# EAGLE board EbookReader_Board (EAGLE 9.7.0)
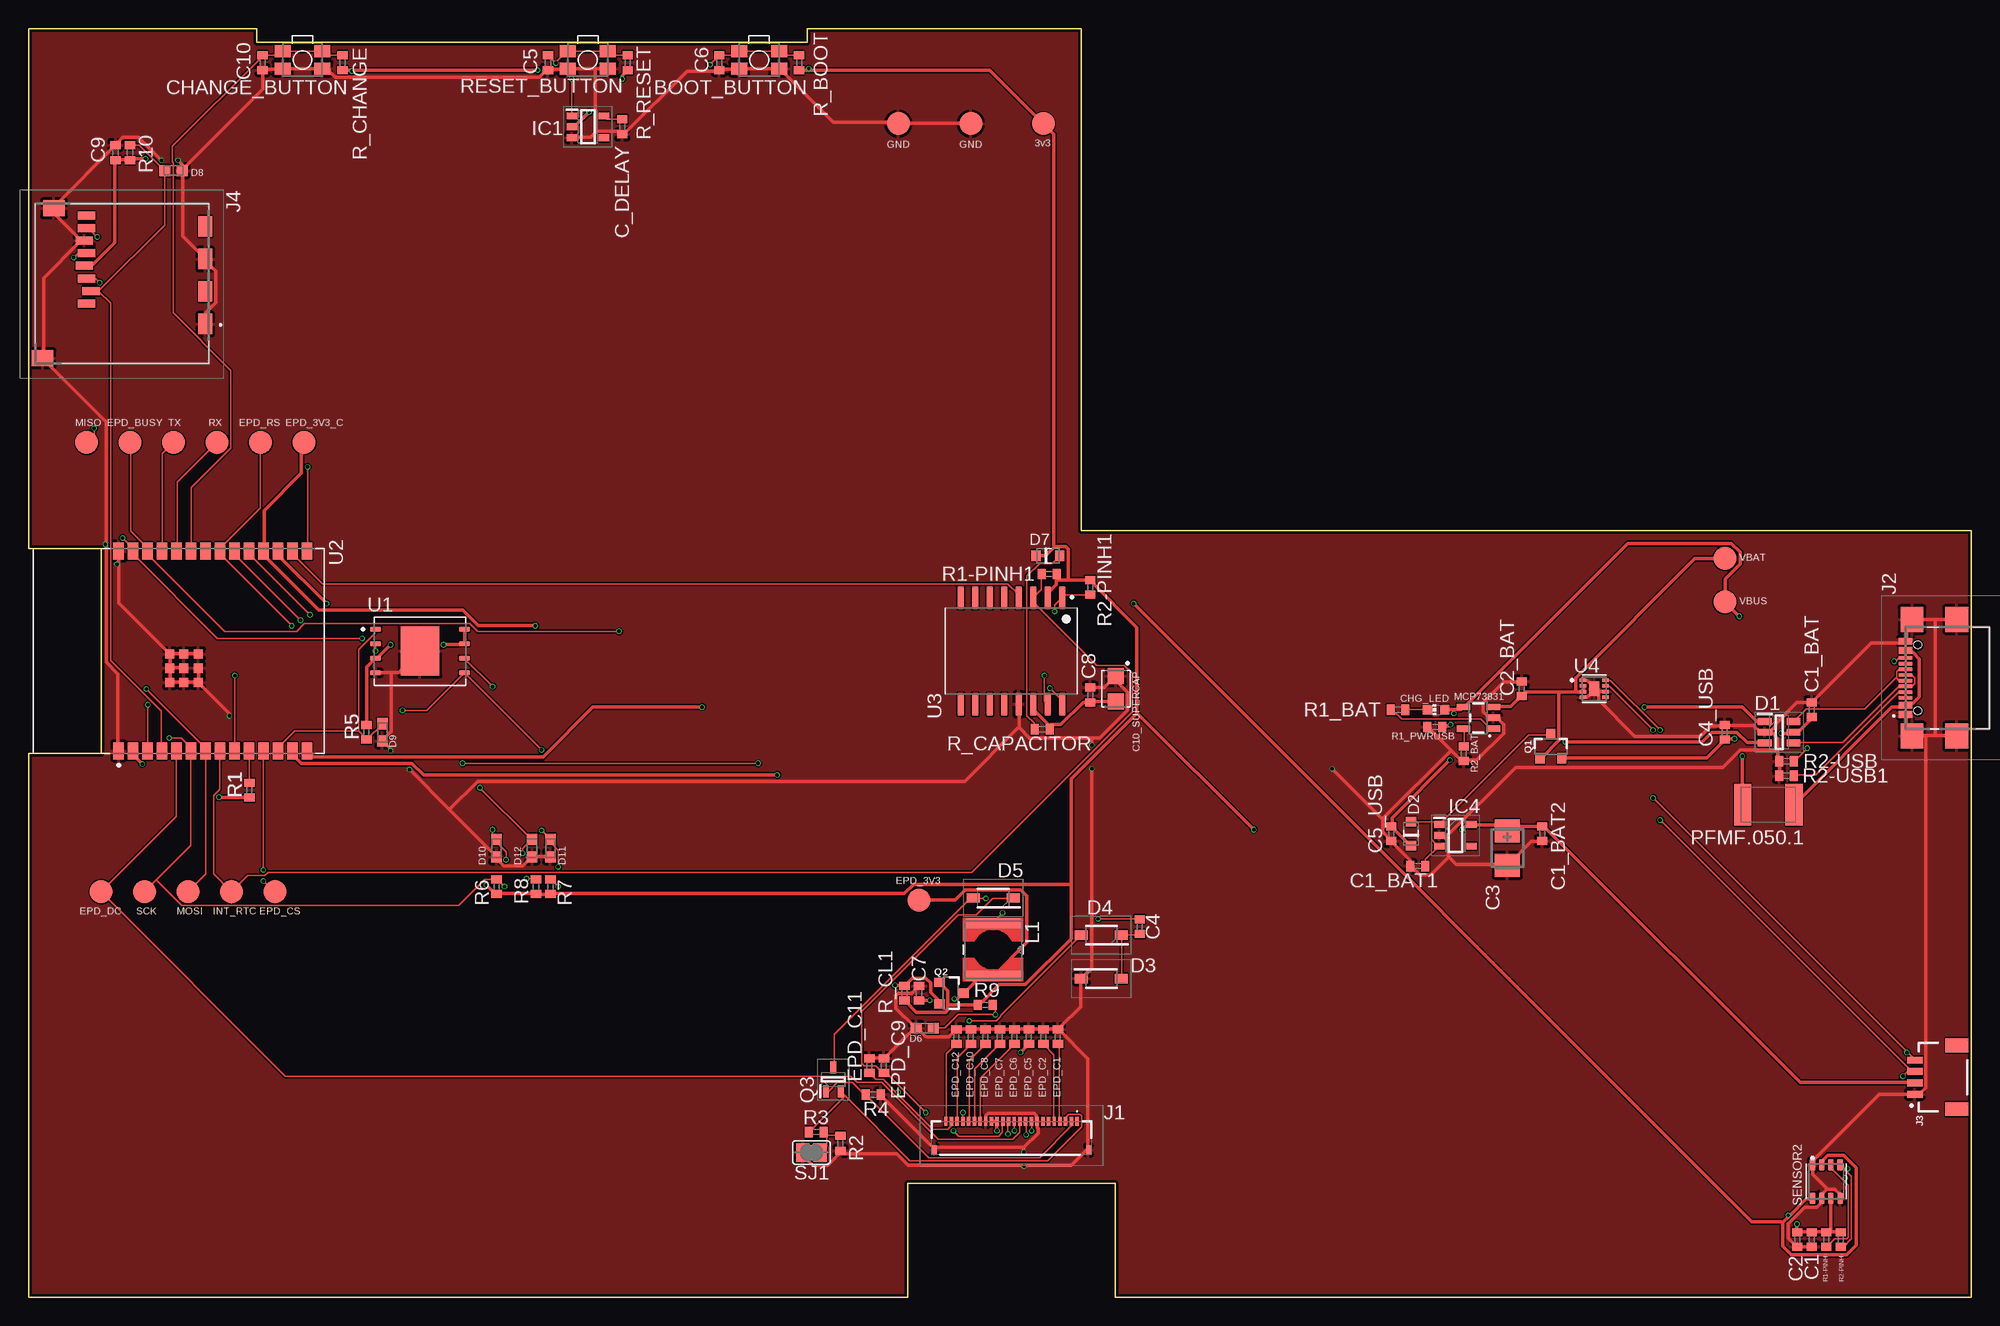
[diagram p0: board, top side]
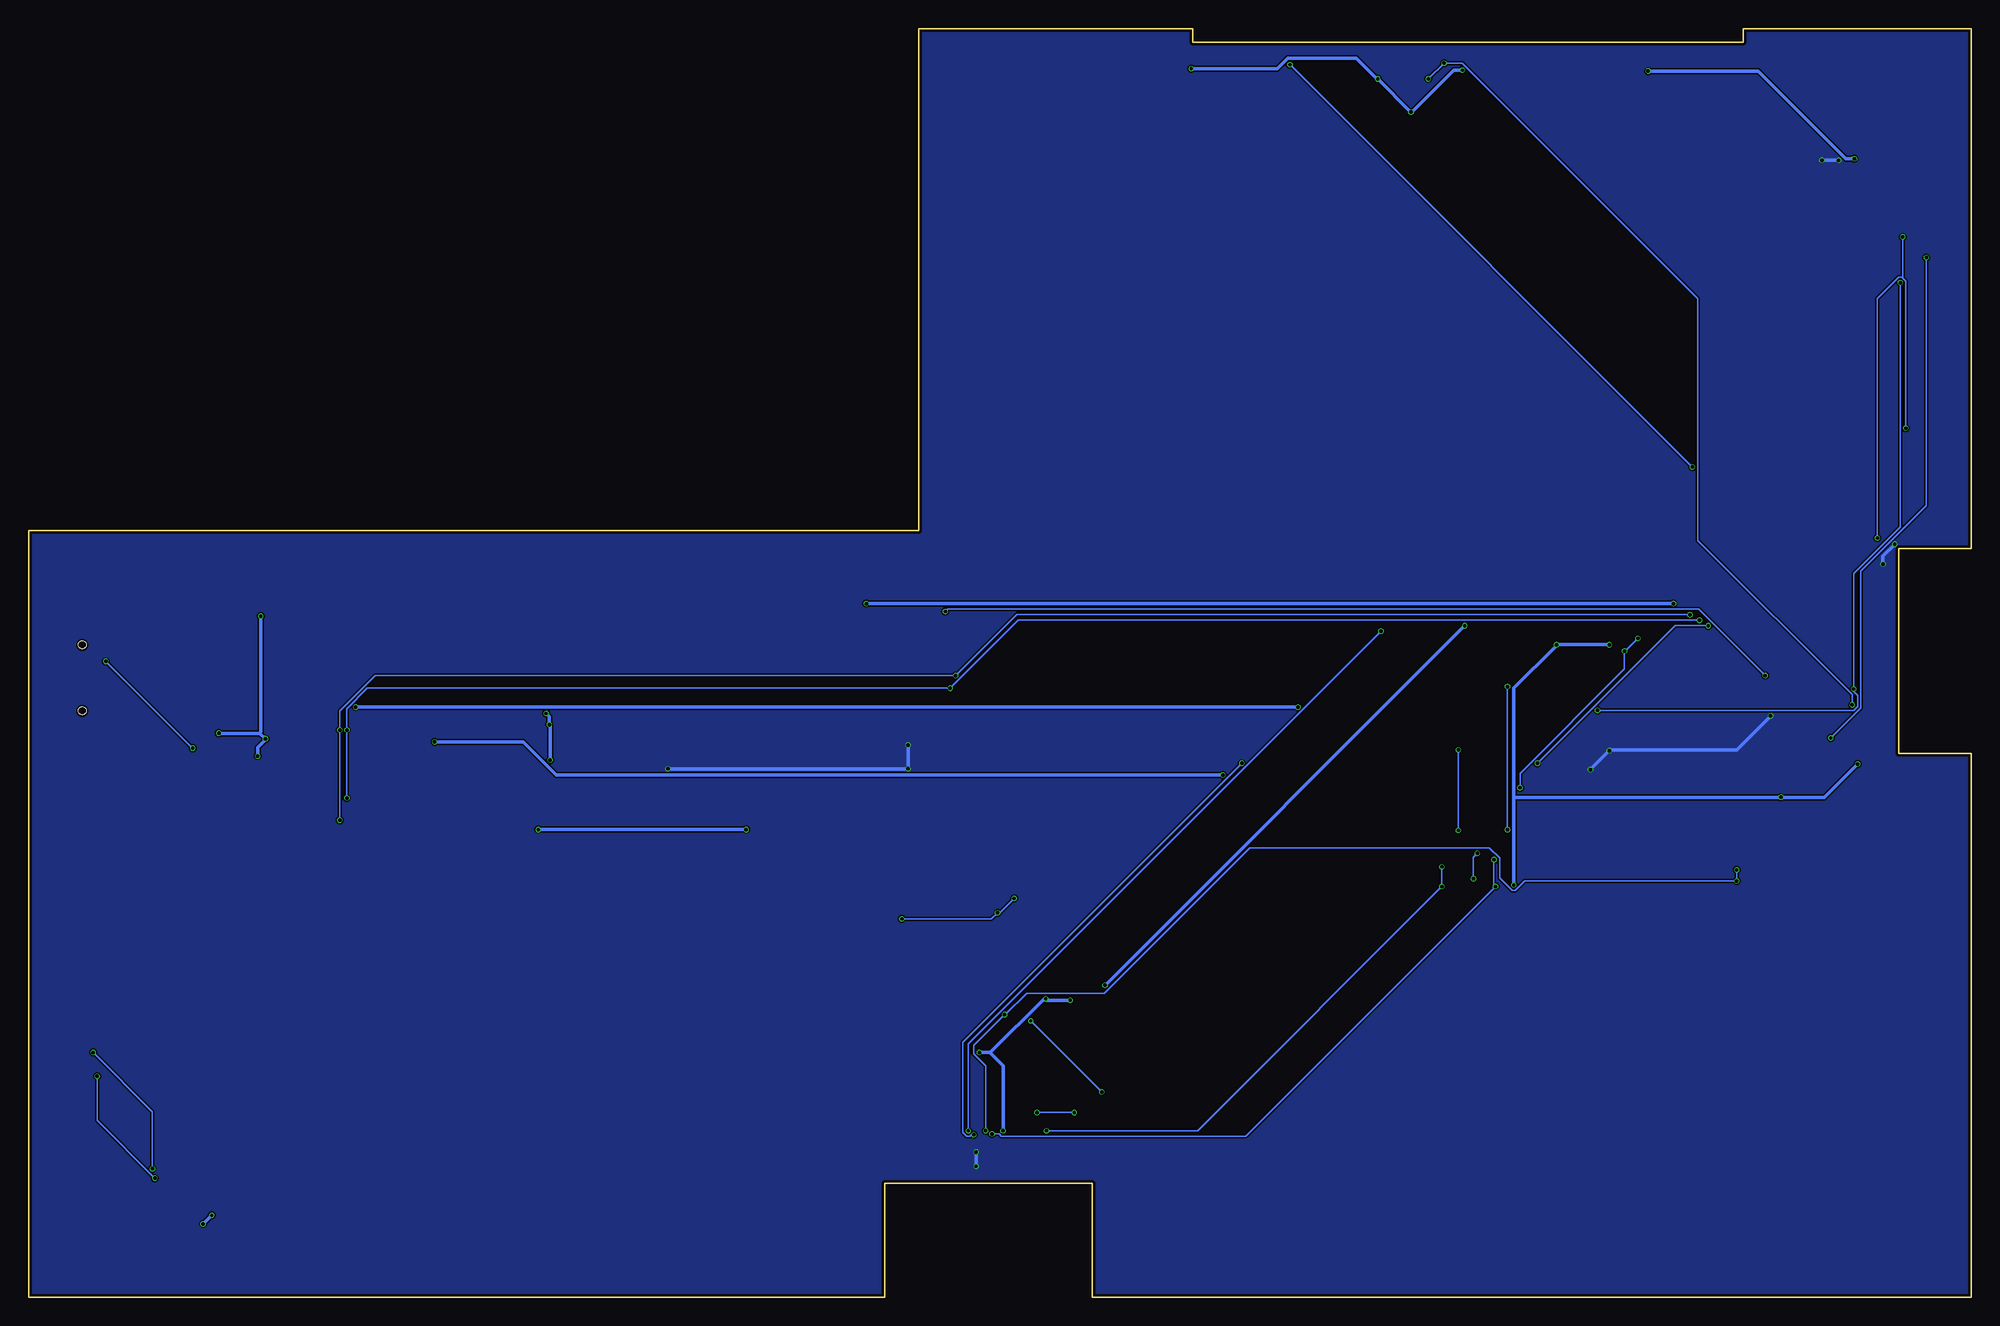
[diagram p1: board, bottom side, seen from below]

Size 170.2 x 111.2 mm. Coordinates in mm from the lower left corner, seen from the top.
Outline: 0,0 77,0 77,10 95.2,10 95.2,0 170.2,0 170.2,67.2 92.2,67.2 92.2,111.2 68.23,111.2 68.23,110 20,110 20,111.2 0,111.2 0,65.65 6.35,65.65 6.35,47.65 0,47.65 0,0
Copper layers (1*16): Top 0.035mm / dielectric 1.6mm / Bottom 0.035mm
Design rules "jlcpcb-2layers.dru": minimum track width 0.15mm, minimum drill 0.3mm, track to track 5mil, track to pad 5mil, pad to pad 5mil, via to via 5mil, smd to smd 5mil, copper to edge 0.2mm, drill to drill 6mil, minimum pad ring 10mil, minimum via ring 3mil, stop-mask expansion 4mil, vias tented up to drill 0mil, thermal gap 10mil
Net classes: 0 default: width 0.15 mm; 1 Power: width 0.3 mm

## Footprints (pad centres in the part's own frame; a part is rotated, then mirrored left to right if it is on the bottom)
MYBUTTON = smd 1.4 x 1.05: 1 1.75,0.75; 2 -1.75,0.75; 3 -1.75,-0.75; 4 1.75,-0.75
EAGLE-LTSPICE_C0402 = smd 0.7 x 0.9: 1 -0.65,0; 2 0.65,0
RCL_CT3528 = smd 2 x 2.2: + -1.5,0; - 1.5,0
CAPCP3225X100N = smd 1.4 x 1.4: 1 -1.1,0; 2 1.1,0
ADAFRUIT_CHIP-LED0603 = smd 0.8 x 0.8: A 0,-0.75; C 0,0.75
SOT95P280X145-6N = smd 1.2 x 0.6: 1 -1.25,0.95; 2 -1.25,0; 3 -1.25,-0.95; 4 1.25,-0.95; 5 1.25,0; 6 1.25,0.95
ESP32_WROVER_AVX---SD0805S020S1R0_AVX_SD0805S020S1R0_0 = smd 0.8 x 0.9: 1 -1.05,0; 2 1.05,0
SOD3716X135N = smd 1.15 x 0.8: 1 -1.75,0; 2 1.75,0
DIOC1608X36N = smd 0.97 x 0.94: 1 -0.75,0; 2 0.75,0
SOT95P280X125-5N = smd 0.9 x 0.6: 1 -1.4,0.95; 2 -1.4,0; 3 -1.4,-0.95; 4 1.4,-0.95; 5 1.4,0.95
SOT95P280X120-5N = smd 0.9 x 0.6: 1 -1.4,0.95; 2 -1.4,0; 3 -1.4,-0.95; 4 1.4,-0.95; 5 1.4,0.95
FH34SRJ24S05SH99 = smd 0.3 x 0.8: 1 5.75,1.45; 2 5.25,1.45; 3 4.75,1.45; 4 4.25,1.45; 5 3.75,1.45; 6 3.25,1.45; 7 2.75,1.45; 8 2.25,1.45; 9 1.75,1.45; 10 1.25,1.45; 11 0.75,1.45; 12 0.25,1.45; 13 -0.25,1.45; 14 -0.75,1.45; 15 -1.25,1.45; 16 -1.75,1.45; 17 -2.25,1.45; 18 -2.75,1.45; 19 -3.25,1.45; 20 -3.75,1.45; 21 -4.25,1.45; 22 -4.75,1.45; 23 -5.25,1.45; 24 -5.75,1.45 | smd 0.4 x 0.8: MP1 6.75,-1.05; MP2 -6.75,-1.05
SAMACSYS_PARTS_USB4110GFA = smd 0.3 x 1.15: A1 -3.35,3.678; A4 -2.55,3.678; A5 -1.25,3.678; A6 -0.25,3.678; A7 0.25,3.678; A8 1.25,3.678; A9 2.55,3.678; A12 3.35,3.678; B1 3.05,3.678; B4 2.25,3.678; B5 1.75,3.678; B6 0.75,3.678; B7 -0.75,3.678; B8 -1.75,3.678; B9 -2.25,3.678; B12 -3.05,3.678 | smd 2.18 x 2: MP1 -5.11,-0.827; MP2 5.11,-0.827; MP3 -5.11,3.103; MP4 5.11,3.103 | hole 0.65: -2.89,2.603; 2.89,2.603
JST04_1MM_RA = smd 0.6 x 1.35: 1 -1.5,0; 2 -0.5,0; 3 0.5,0; 4 1.5,0 | smd 1.2 x 2: NC1 2.8,-3.675; NC2 -2.8,-3.675
112ATAARR03ATTEND = smd 1.8 x 1.2: G1 10.6,10.4; G2 4.9,10.4; S1 7.75,10.4; S2 2.05,10.4 | smd 1.4 x 1.9: G3 13.6,-3.85; G4 0.45,-2.85 | smd 0.7 x 1.5: P1 8.8,0; P2 7.7,0.4; P3 6.6,0; P4 5.5,-0.2; P5 4.4,0; P6 3.3,-0.2; P7 2.2,0; P8 1.1,0
IND_4828-WE-TPC_WRE = smd 0.889 x 4.826: 1 -2.286,0; 2 2.286,0
ESP32_WROVER_SPARKFUN-IC-POWER_SOT23-5 = smd 0.55 x 1.2: 1 -0.95,-1.3; 2 0,-1.3; 3 0.95,-1.3; 4 0.95,1.3; 5 -0.95,1.3
ESP32C6_VARISTOR_CT/CN1812 = smd 1.5 x 3.6: 1 -2.25,0; 2 2.25,0
ESP32_WROVER_SPARKFUN-DISCRETESEMI_SOT23-3 = smd 0.8 x 0.9: 1 -0.95,-1; 2 0.95,-1; 3 0,1.1
SOT65P210X110-3N = smd 1.05 x 0.5: 1 -1.05,0.65; 2 -1.05,-0.65; 3 1.05,0
ESP32_WROVER_EAGLE-LTSPICE_R0402 = smd 0.7 x 0.9: 1 -0.65,0; 2 0.65,0
ESP32_WROVER_BME680_PSON80P300X300X100-8N = smd 1.016 x 0.5: 1 1.458,1.2; 2 1.458,0.4; 3 1.458,-0.4; 4 1.458,-1.2; 5 -1.458,-1.22; 6 -1.458,-0.4; 7 -1.458,0.4; 8 -1.458,1.2
SJ = smd 1.168 x 1.6: 1 -0.762,0; 2 0.762,0
TP20R = smd 2 x 2: TP 0,0
SON127P600X800X80-9N = smd 0.94 x 0.44: 1 -3.895,1.905; 2 -3.895,0.635; 3 -3.895,-0.635; 4 -3.895,-1.905; 5 3.895,-1.905; 6 3.895,-0.635; 7 3.895,0.635; 8 3.895,1.905 | smd 3.4 x 4.3: 9 0,0
XCVR_ESP32-C6-WROOM-1-N8 = smd 1.5 x 0.9: 1 -8.75,5.26; 2 -8.75,3.99; 3 -8.75,2.72; 4 -8.75,1.45; 5 -8.75,0.18; 6 -8.75,-1.09; 7 -8.75,-2.36; 8 -8.75,-3.63; 9 -8.75,-4.9; 10 -8.75,-6.17; 11 -8.75,-7.44; 12 -8.75,-8.71; 13 -8.75,-9.98; 14 -8.75,-11.25; 15 8.75,-11.25; 16 8.75,-9.98; 17 8.75,-8.71; 18 8.75,-7.44; 19 8.75,-6.17; 20 8.75,-4.9; 21 8.75,-3.63; 22 8.75,-2.36; 23 8.75,-1.09; 24 8.75,0.18; 25 8.75,1.45; 26 8.75,2.72; 27 8.75,3.99; 28 8.75,5.26 | smd 0.8 x 0.8: 29_1 -2.755,0.79; 29_2 -1.505,0.79; 29_3 -0.255,0.79; 29_4 -2.755,-0.46; 29_5 -1.505,-0.46; 29_6 -0.255,-0.46; 29_7 -2.755,-1.71; 29_8 -1.505,-1.71; 29_9 -0.255,-1.71
SOIC127P1032X265-16N = smd 2.05 x 0.59: 1 -4.655,4.445; 2 -4.655,3.175; 3 -4.655,1.905; 4 -4.655,0.635; 5 -4.655,-0.635; 6 -4.655,-1.905; 7 -4.655,-3.175; 8 -4.655,-4.445; 9 4.655,-4.445; 10 4.655,-3.175; 11 4.655,-1.905; 12 4.655,-0.635; 13 4.655,0.635; 14 4.655,1.905; 15 4.655,3.175; 16 4.655,4.445
SON50P200X200X80-9N = smd 0.635 x 0.305: 1 -0.985,0.75; 2 -0.985,0.25; 3 -0.985,-0.25; 4 -0.985,-0.75; 5 0.985,-0.75; 6 0.985,-0.25; 7 0.985,0.25; 8 0.985,0.75 | smd 0.9 x 1.3: 9 0,0

## Placement (x,y rotation side)
BOOT_BUTTON  BUTTON_CUSYOMV1FINAL_BUTT  [MYBUTTON]  64,108.45 180 top
C1  100nF  [EAGLE-LTSPICE_C0402]  156.21,5.08 270 top
C1_BAT  4.7uF  [EAGLE-LTSPICE_C0402]  156.21,51.5 90 top
C1_BAT1  4.7uF  [EAGLE-LTSPICE_C0402]  121.7,37.8 180 top
C1_BAT2  4.7uF  [EAGLE-LTSPICE_C0402]  132.6,40.64 270 top
C2  100nF  [EAGLE-LTSPICE_C0402]  154.94,5.08 270 top
C2_BAT  4.7uF  [EAGLE-LTSPICE_C0402]  130.81,53.34 90 top
C3  100uF TANT  [RCL_CT3528]  129.54,39.37 270 top
C4  4.7uF/25V  [EAGLE-LTSPICE_C0402]  97.35,32.5 90 top
C4_USB  100nF  [EAGLE-LTSPICE_C0402]  148.59,49.53 90 top
C5  1uF  [EAGLE-LTSPICE_C0402]  45.5,108.2 270 top
C5_USB  4.7uF  [EAGLE-LTSPICE_C0402]  119.38,40.64 270 top
C6  100nF  [EAGLE-LTSPICE_C0402]  60.5,108.2 270 top
C7  10uF  [EAGLE-LTSPICE_C0402]  78,26.67 90 top
C8  100nF  [EAGLE-LTSPICE_C0402]  93,52.8 90 top
C9  100nF  [EAGLE-LTSPICE_C0402]  7.62,100.33 90 top
C10  100nF  [EAGLE-LTSPICE_C0402]  20.5,108.2 270 top
C10_SUPERCAP  CPH3225A  [CAPCP3225X100N]  95.25,53.34 270 top
C_DELAY  100nF  [EAGLE-LTSPICE_C0402]  52,102.58 270 top
CHANGE_BUTTON  BUTTON_CUSYOMV1FINAL_BUTT  [MYBUTTON]  24,108.45 180 top
CHG_LED  [ADAFRUIT_CHIP-LED0603]  123.3,51.5 90 top
D1  USBLC6-2SC6Y  [SOT95P280X145-6N]  153.35,49.53 0 top
D2  ESP32_WROVER_AVX---SD0805S020S1R0_AVX_SD0805S020S1R0_0_0  [ESP32_WROVER_AVX---SD0805S020S1R0_AVX_SD0805S020S1R0_0]  121.1,40.64 90 top
D3  MBR0530MYSOD  [SOD3716X135N]  93.98,27.94 0 top
D4  MBR0530MYSOD  [SOD3716X135N]  93.98,31.75 180 top
D5  MBR0530MYSOD  [SOD3716X135N]  84.5,35 180 top
D6  PGB1010603MRMYDIOC  [DIOC1608X36N]  78.5,23.6 0 top
D7  ESP32_WROVER_AVX---SD0805S020S1R0_AVX_SD0805S020S1R0_0_0  [ESP32_WROVER_AVX---SD0805S020S1R0_AVX_SD0805S020S1R0_0]  89.3,65 0 top
D8  PGB1010603MRMYDIOC  [DIOC1608X36N]  12.7,98.75 180 top
D9  PGB1010603MRMYDIOC  [DIOC1608X36N]  31,49.53 90 top
D10  PGB1010603MRMYDIOC  [DIOC1608X36N]  41,39.37 90 top
D11  PGB1010603MRMYDIOC  [DIOC1608X36N]  45.72,39.37 90 top
D12  PGB1010603MRMYDIOC  [DIOC1608X36N]  44.11,39.37 90 top
EPD_C1  1uF/50V  [EAGLE-LTSPICE_C0402]  90.17,22.86 90 top
EPD_C2  1uF/50V  [EAGLE-LTSPICE_C0402]  88.9,22.86 90 top
EPD_C5  0.1uF/50V  [EAGLE-LTSPICE_C0402]  87.63,22.86 90 top
EPD_C6  1uF/50V  [EAGLE-LTSPICE_C0402]  86.36,22.86 90 top
EPD_C7  1uF/50V  [EAGLE-LTSPICE_C0402]  85.09,22.86 90 top
EPD_C8  1uF/50V  [EAGLE-LTSPICE_C0402]  83.82,22.86 90 top
EPD_C9  1uF/50V  [EAGLE-LTSPICE_C0402]  74.93,20.32 90 top
EPD_C10  1uF/50V  [EAGLE-LTSPICE_C0402]  82.55,22.86 90 top
EPD_C11  1uF/50V  [EAGLE-LTSPICE_C0402]  73.66,20.32 90 top
EPD_C12  1uF/50V  [EAGLE-LTSPICE_C0402]  81.28,22.86 90 top
IC1  BD5229G-TR  [SOT95P280X125-5N]  49,102.58 0 top
IC4  XC6220A331MR-G  [SOT95P280X120-5N]  125,40.5 0 top
J1  FH34SRJ-24S-0.5SH_99_  [FH34SRJ24S05SH99]  86.1,13.97 0 top
J2  SAMACSYS_PARTS_USB4110-GF-A  [SAMACSYS_PARTS_USB4110GFA]  168.1,54.3 90 top
J3  QWIIC_RIGHT_ANGLE  [JST04_1MM_RA]  165.24,19.3 90 top
J4  112A-TAAR-R03_ATTEND  [112ATAARR03ATTEND]  5.08,95.9 270 top
L1  744043680IND_4828-WE-TPC_WRE  [IND_4828-WE-TPC_WRE]  84.5,30.48 270 top
MCP73831  ESP32_WROVER_SPARKFUN-IC-POWER_MCP73831  [ESP32_WROVER_SPARKFUN-IC-POWER_SOT23-5]  127,50.8 90 top
PFMF.050.1  ESP32C6_VARISTORCN1812  [ESP32C6_VARISTOR_CT/CN1812]  152.4,43.18 180 top
Q1  20V/4.2A/52mΩ/1.4W  [ESP32_WROVER_SPARKFUN-DISCRETESEMI_SOT23-3]  133.35,48.26 0 top
Q2  20V/4.2A/52mΩ/1.4W  [ESP32_WROVER_SPARKFUN-DISCRETESEMI_SOT23-3]  80.8,26.67 270 top
Q3  SI1308EDL-T1-GE3  [SOT65P210X110-3N]  70.5,19.1 90 top
R1  10K  [ESP32_WROVER_EAGLE-LTSPICE_R0402]  19.35,44.45 90 top
R1-PINH  10k  [ESP32_WROVER_EAGLE-LTSPICE_R0402]  157.48,5.08 90 top
R1-PINH1  10k  [ESP32_WROVER_EAGLE-LTSPICE_R0402]  89.4,63.4 0 top
R1_BAT  200  [ESP32_WROVER_EAGLE-LTSPICE_R0402]  119.96,51.5 0 top
R1_PWRUSB  100K  [ESP32_WROVER_EAGLE-LTSPICE_R0402]  123.19,50 0 top
R2  2.2  [ESP32_WROVER_EAGLE-LTSPICE_R0402]  71.12,13.5 90 top
R2-PINH  10k  [ESP32_WROVER_EAGLE-LTSPICE_R0402]  158.75,5.08 90 top
R2-PINH1  10k  [ESP32_WROVER_EAGLE-LTSPICE_R0402]  93,62.23 90 top
R2-USB  5k1  [ESP32_WROVER_EAGLE-LTSPICE_R0402]  154,46.99 180 top
R2-USB1  5k1  [ESP32_WROVER_EAGLE-LTSPICE_R0402]  154,45.72 0 top
R2_BAT  2K  [ESP32_WROVER_EAGLE-LTSPICE_R0402]  125.73,47.65 90 top
R3  0.47  [ESP32_WROVER_EAGLE-LTSPICE_R0402]  69,14.5 0 top
R4  10K  [ESP32_WROVER_EAGLE-LTSPICE_R0402]  74,17.78 0 top
R5  10k  [ESP32_WROVER_EAGLE-LTSPICE_R0402]  29.6,49.53 90 top
R6  10k  [ESP32_WROVER_EAGLE-LTSPICE_R0402]  41,36 270 top
R7  10k  [ESP32_WROVER_EAGLE-LTSPICE_R0402]  45.72,36 270 top
R8  10k  [ESP32_WROVER_EAGLE-LTSPICE_R0402]  44.45,36 270 top
R9  10k  [ESP32_WROVER_EAGLE-LTSPICE_R0402]  83.82,25.65 180 top
R10  10k  [ESP32_WROVER_EAGLE-LTSPICE_R0402]  8.89,100.33 270 top
R_BOOT  10k  [ESP32_WROVER_EAGLE-LTSPICE_R0402]  67.5,108.2 90 top
R_CAPACITOR  15  [ESP32_WROVER_EAGLE-LTSPICE_R0402]  88.8,49.8 180 top
R_CHANGE  10k  [ESP32_WROVER_EAGLE-LTSPICE_R0402]  27.5,108.2 90 top
R_CL1  10k  [ESP32_WROVER_EAGLE-LTSPICE_R0402]  76.73,26.67 90 top
R_RESET  10k  [ESP32_WROVER_EAGLE-LTSPICE_R0402]  52.5,108.2 90 top
RESET_BUTTON  BUTTON_CUSYOMV1FINAL_BUTT  [MYBUTTON]  49,108.45 180 top
SENSOR2  ESP32_WROVER_BME680_BME680  [ESP32_WROVER_BME680_PSON80P300X300X100-8N]  157.48,10.16 90 top
SJ1  [SJ]  68.58,12.7 0 top
TP1  TP  [TP20R]  12.7,74.93 0 top
TP2  TP  [TP20R]  16.51,74.93 0 top
TP3  TP  [TP20R]  148.59,64.77 0 top
TP4  TP  [TP20R]  82.55,102.87 0 top
TP5  TP  [TP20R]  76.2,102.87 0 top
TP6  TP  [TP20R]  5.08,74.93 0 top
TP7  TP  [TP20R]  13.97,35.56 0 top
TP8  TP  [TP20R]  10.16,35.56 0 top
TP9  TP  [TP20R]  8.89,74.93 0 top
TP10  TP  [TP20R]  21.59,35.56 0 top
TP11  TP  [TP20R]  6.35,35.56 0 top
TP12  TP  [TP20R]  20.32,74.93 0 top
TP13  TP  [TP20R]  24.13,74.93 0 top
TP14  TP  [TP20R]  148.59,60.96 0 top
TP15  TP  [TP20R]  17.78,35.56 0 top
TP16  TP  [TP20R]  88.9,102.87 0 top
TP17  TP  [TP20R]  78,34.8 0 top
U1  W25Q512JVEIQ  [SON127P600X800X80-9N]  34.29,56.65 0 top
U2  ESP32-C6-WROOM-1-N8  [XCVR_ESP32-C6-WROOM-1-N8]  13.15,56.65 90 top
U3  DS3231SN#  [SOIC127P1032X265-16N]  86.1,56.65 270 top
U4  MAX17048G+T10  [SON50P200X200X80-9N]  137.16,53.34 0 top

## Library data of the parts
BOOT_BUTTON CHANGE_BUTTON RESET_BUTTON = DeskCopy
C1 C1_BAT C1_BAT1 C1_BAT2 C2 C2_BAT C4 C4_USB C5 C5_USB C6-C10 C_DELAY CHG_LED D3-D6 D8-D12 EPD_C1 EPD_C2 EPD_C5-EPD_C12 PFMF.050.1 R1 R1-PINH R1-PINH1 R1_BAT R1_PWRUSB R2 R2-PINH R2-PINH1 R2-USB R2-USB1 R2_BAT R3-R10 R_BOOT R_CAPACITOR R_CHANGE R_CL1 R_RESET SJ1 TP1-TP17 = DeskAssistant v19 v1
C3 = DeskAssistant v19 v1; SPICEPREFIX: C
C10_SUPERCAP = DeskAssistant v19 v1; AVAILABILITY: Not in stock; CHECK_PRICES: https://www.snapeda.com/parts/CPH3225A/Seiko+Instruments/view-part/?ref=eda; DESCRIPTION: 11 mF (EDLC) Supercapacitor 3.3 V 1210 (3225 Metric) - -; MF: Seiko Instruments; MP: CPH3225A; PACKAGE: 1210 Seiko; PRICE: None; PURCHASE-URL: https://www.snapeda.com/api/url_track_click_mouser/?unipart_id=562593&manufacturer=Seiko Instruments&part_name=CPH3225A&search_term=None; SNAPEDA_LINK: https://www.snapeda.com/parts/CPH3225A/Seiko+Instruments/view-part/?ref=snap
D1 = DeskAssistant v19 v1; AVAILABILITY: In Stock; CHECK_PRICES: https://www.snapeda.com/parts/USBLC6-2SC6Y/STMicroelectronics/view-part/?ref=eda; DESCRIPTION: 17V Clamp 5A (8/20µs) Ipp Tvs Diode Surface Mount SOT-23-6; MF: STMicroelectronics; MP: USBLC6-2SC6Y; PACKAGE: SOT-23-6 STMicroelectronics; PRICE: None; SNAPEDA_LINK: https://www.snapeda.com/parts/USBLC6-2SC6Y/STMicroelectronics/view-part/?ref=snap
D2 D7 = DeskAssistant v19 v1; FOOPRINT: SD0805S020S1R0
IC1 = DeskAssistant v19 v1; DESCRIPTION: Voltage Detector with Adjustable Delay Time: CMOS processes are utilized to develop high precision, low current consumption CMOS reset ICs that allow arbitrary setting of the delay time. The extensive lineup includes both Nch Open Drain and CMOS output types in a wide range of detection voltages (from 2.3V to 6.0V, in 0.1V steps), enabling selection of the ideal solution based on customer requirements. In addition, the entire series is of course both lead-free and RoHS-compliant.; HEIGHT: 1.25mm; MANUFACTURER_NAME: ROHM Semiconductor; MANUFACTURER_PART_NUMBER: BD5229G-TR; MOUSER_PART_NUMBER: 755-BD5229G-TR; MOUSER_PRICE-STOCK: https://www.mouser.co.uk/ProductDetail/ROHM-Semiconductor/BD5229G-TR?qs=4kLU8WoGk0vvnhrrYwdszw%3D%3D
IC4 = DeskAssistant v19 v1; DESCRIPTION: LDO Voltage Regulators; HEIGHT: 1.2mm; MANUFACTURER_NAME: Torex; MANUFACTURER_PART_NUMBER: XC6220A331MR-G; MOUSER_PART_NUMBER: 865-XC6220A331MR-G; MOUSER_PRICE-STOCK: https://www.mouser.co.uk/ProductDetail/Torex-Semiconductor/XC6220A331MR-G?qs=AsjdqWjXhJ8ZSWznL1J0gg%3D%3D
J1 = DeskAssistant v19 v1; DESCRIPTION: 24 Position FFC, FPC Connector Contacts, Top and Bottom 0.020" (0.50mm) Surface Mount, Right Angle; HEIGHT: 1.1mm; MANUFACTURER_NAME: Hirose; MANUFACTURER_PART_NUMBER: FH34SRJ-24S-0.5SH(99); MOUSER_PART_NUMBER: 798-FH34SRJ24S05SH99; MOUSER_PRICE-STOCK: https://www.mouser.co.uk/ProductDetail/Hirose-Connector/FH34SRJ-24S-0.5SH99?qs=vcbW%252B4%252BSTIpKBl5ap9J8Fw%3D%3D
J2 = DeskCopy; DESCRIPTION: CONN USB 2.0 TYPE-C R/A SMT; HEIGHT: 3.26mm; MANUFACTURER_NAME: GCT (GLOBAL CONNECTOR TECHNOLOGY); MANUFACTURER_PART_NUMBER: USB4110-GF-A; MOUSER_PART_NUMBER: 640-USB4110-GF-A; MOUSER_PRICE-STOCK: https://www.mouser.co.uk/ProductDetail/GCT/USB4110-GF-A?qs=KUoIvG%2F9IlYiZvIXQjyJeA%3D%3D
J3 = DeskAssistant v19 v1; PROD_ID: CONN-13694
J4 = DeskAssistant v19 v1; DESCRIPTION: Micro SD Card Socket, Push-Push Type, Top Mount, SMT, H=1.83mm, 10u; HEIGHT: 1.9mm; MANUFACTURER_NAME: ATTEND; MANUFACTURER_PART_NUMBER: 112A-TAAR-R03 ATTEND
L1 = DeskAssistant v19 v1; COPYRIGHT: Copyright (C) 2024 Ultra Librarian. All rights reserved.; MANUFACTURER_PART_NUMBER: 744043680; MFR_NAME: Wurth Electronics; VAL: 68uH
MCP73831 = DeskAssistant v19 v1; PROD_ID: IC-09995
Q1 Q2 = DeskAssistant v19 v1; FOOTPRINT: DMG2305UX-7
Q3 = DeskAssistant v19 v1; AVAILABILITY: In Stock; CHECK_PRICES: https://www.snapeda.com/parts/SI1308EDL-T1-GE3/Vishay+Siliconix/view-part/?ref=eda; DESCRIPTION: Si1308EDL-T1-GE3 N-channel MOSFET Transistor, 1.5 A, 30 V, 3-Pin SC-70 | Siliconix / Vishay SI1308EDL-T1-GE3; MF: Vishay Siliconix; MP: SI1308EDL-T1-GE3; PACKAGE: SOT-323 Vishay Semiconductor; PRICE: None; PURCHASE-URL: https://www.snapeda.com/api/url_track_click_mouser/?unipart_id=274603&manufacturer=Vishay Siliconix&part_name=SI1308EDL-T1-GE3&search_term=None; SNAPEDA_LINK: https://www.snapeda.com/parts/SI1308EDL-T1-GE3/Vishay+Siliconix/view-part/?ref=snap
SENSOR2 = DeskAssistant v19 v1; AVAILABILITY: Unavailable; DESCRIPTION: Integrated Environmental Unit; FOOTPRINT: BME688; MF: Bosch Sensortec; MP: BME680; PACKAGE: LGA-8 Bosch Tools; PRICE: None
U1 = DeskAssistant v19 v1; AVAILABILITY: In Stock; CHECK_PRICES: https://www.snapeda.com/parts/W25Q512JVEIQ/Winbond+Electronics/view-part/?ref=eda; DESCRIPTION: FLASH - NOR Memory IC 512Mb (64M x 8) SPI - Quad I/O 133 MHz 8-WSON (8x6); MF: Winbond Electronics; MP: W25Q512JVEIQ; PACKAGE: Package; PRICE: None; SNAPEDA_LINK: https://www.snapeda.com/parts/W25Q512JVEIQ/Winbond+Electronics/view-part/?ref=snap
U2 = DeskAssistant v19 v1; AVAILABILITY: In Stock; CHECK_PRICES: https://www.snapeda.com/parts/ESP32-C6-WROOM-1-N8/Espressif+Systems/view-part/?ref=eda; DESCRIPTION: Multiprotocol Modules ESP32-C6 module, Wi-Fi 6 in 2.4 GHz band, Bluetooth 5, Zigbee 3.0 and Thread. ESP34-WROOM Compatible - ENGINEERING SAMPLE; MF: Espressif Systems; MP: ESP32-C6-WROOM-1-N8; PACKAGE: None; PRICE: None; SNAPEDA_LINK: https://www.snapeda.com/parts/ESP32-C6-WROOM-1-N8/Espressif+Systems/view-part/?ref=snap
U3 = DeskAssistant v19 v1; AVAILABILITY: In Stock; CHECK_PRICES: https://www.snapeda.com/parts/DS3231SN%23/Analog+Devices/view-part/?ref=eda; DESCRIPTION: Extremely Accurate I²C-Integrated RTC/TCXO/Crystal; MF: Analog Devices; MP: DS3231SN#; PACKAGE: SOIC-16 Maxim; PRICE: None; PURCHASE-URL: https://www.snapeda.com/api/url_track_click_mouser/?unipart_id=99048&manufacturer=Analog Devices&part_name=DS3231SN#&search_term=None; SNAPEDA_LINK: https://www.snapeda.com/parts/DS3231SN%23/Analog+Devices/view-part/?ref=snap
U4 = DeskAssistant v19 v1; AVAILABILITY: In Stock; CHECK_PRICES: https://www.snapeda.com/parts/MAX17048G+T10/Analog+Devices/view-part/?ref=eda; DESCRIPTION: 3µA 1-Cell/2-Cell Fuel Gauge with ModelGauge; MF: Analog Devices; MP: MAX17048G+T10; PACKAGE: TDFN-8 Maxim; PRICE: None; PURCHASE-URL: https://www.snapeda.com/api/url_track_click_mouser/?unipart_id=329239&manufacturer=Analog Devices&part_name=MAX17048G+T10&search_term=None; SNAPEDA_LINK: https://www.snapeda.com/parts/MAX17048G+T10/Analog+Devices/view-part/?ref=snap; SPICEPREFIX: X

## Nets
3V3 [Power]: C1_BAT2.1 C3.+ C9.1 D7.1 IC1.2 IC4.5 J3.2 J4.P4 Q2.1 R1-PINH1.2 R1.1 R2-PINH1.2 R5.2 R6.2 R7.2 R8.2 R9.2 R10.2 R_BOOT.1 R_CHANGE.1 R_CL1.1 R_RESET.1 TP16.TP U1.3 U1.7 U1.8 U2.2 U3.2
32KHZ: R2-PINH1.1 U2.9 U3.1
DN: D1.4 J2.A7 J2.B7
DP: D1.6 J2.A6 J2.B6
EPD_3V3 [Power]: C7.1 EPD_C5.1 J1.15 J1.16 L1.2 Q2.3 TP17.TP
EPD_3V3_C [Power]: Q2.2 R_CL1.2 TP13.TP U2.18
EPD_BUSY: J1.9 TP9.TP U2.26
EPD_CS: D6.2 J1.12 R9.1 TP10.TP U2.11
EPD_DC: J1.11 TP11.TP U2.5
EPD_RST: J1.10 TP12.TP U2.21
FLASH_CS: D9.2 R5.1 U1.1 U2.12
GDR: J1.2 Q3.1 R4.1
GND [Power]: BOOT_BUTTON.1 BOOT_BUTTON.2 C1.2 C1_BAT1.2 C1_BAT2.2 C1_BAT.2 C2.2 C2_BAT.2 C3.- C4_USB.2 C5.2 C5_USB.2 C6.2 C7.2 C8.2 C9.2 C10.2 C10_SUPERCAP.1 C_DELAY.2 CHANGE_BUTTON.1 CHANGE_BUTTON.2 D1.2 D3.1 D6.1 D8.1 D9.1 D10.1 D11.1 D12.1 EPD_C1.2 EPD_C2.2 EPD_C5.2 EPD_C6.2 EPD_C7.2 EPD_C8.2 EPD_C9.2 EPD_C10.2 EPD_C11.2 EPD_C12.2 IC1.3 IC4.2 J1.8 J1.17 J1.MP1 J1.MP2 J2.A1 J2.A12 J2.B1 J2.B12 J2.MP1 J2.MP2 J2.MP3 J2.MP4 J3.1 J4.G1 J4.G2 J4.G3 J4.G4 J4.P6 MCP73831.2 R1_PWRUSB.1 R2-USB1.1 R2-USB.2 R2.1 R2_BAT.1 R4.2 RESET_BUTTON.1 RESET_BUTTON.2 SENSOR2.1 SENSOR2.5 SENSOR2.7 SJ1.1 TP4.TP TP5.TP U1.4 U1.9 U2.1 U2.28 U2.29_1 U2.29_2 U2.29_3 U2.29_4 U2.29_5 U2.29_6 U2.29_7 U2.29_8 U2.29_9 U3.13 U4.1 U4.4 U4.6 U4.9
GPIO8: R1.2 U2.10
I2C_PW [Power]: C1.1 C2.1 R1-PINH.2 R2-PINH.2 SENSOR2.2 SENSOR2.6 SENSOR2.8 U2.17
INT_RTC: R1-PINH1.1 TP15.TP U2.8 U3.3
IO/BOOT: BOOT_BUTTON.3 BOOT_BUTTON.4 C6.1 R_BOOT.2 U2.15
IO/CHANGE: C10.1 CHANGE_BUTTON.3 CHANGE_BUTTON.4 R_CHANGE.2 U2.23
MISO: D12.2 J4.P7 R8.1 TP6.TP U1.2 U2.27
MOSI: D11.2 J1.14 J4.P3 R7.1 TP7.TP U1.5 U2.7
N$1: MCP73831.1 R1_BAT.1
N$2: J2.A5 R2-USB1.2
N$3: J2.B5 R2-USB.1
N$4: C1_BAT1.1 D2.2 IC4.1 IC4.3 Q1.3
N$5: EPD_C2.1 J1.5
N$6: EPD_C1.1 J1.4
N$7: EPD_C6.1 J1.18
N$8: EPD_C7.1 J1.19
N$9: EPD_C8.1 J1.20
N$11: EPD_C10.1 J1.22
N$13: EPD_C12.1 J1.24
N$31: CHG_LED.C R1_BAT.2
N$32: D7.2 R_CAPACITOR.2
N$35: MCP73831.5 R2_BAT.2
N$36: C4.1 D3.2 D4.1
N$37: C_DELAY.1 IC1.5
PREVGH: D5.1 EPD_C9.1 J1.21
PREVGL: D4.2 EPD_C11.1 J1.23
RESE: J1.3 Q3.2 R3.1
RESE': R2.2 R3.2 SJ1.2
RESET: C5.1 IC1.1 R_RESET.2 RESET_BUTTON.3 RESET_BUTTON.4 U2.3
RTC_RST: U2.16 U3.4
RX: TP2.TP U2.24
SCK: D10.2 J1.13 J4.P5 R6.1 TP8.TP U1.6 U2.6
SCL: J3.4 R2-PINH.1 SENSOR2.4 U2.20 U3.16 U4.7
SDA: J3.3 R1-PINH.1 SENSOR2.3 U2.19 U3.15 U4.8
SRC: C4.2 D5.2 L1.1 Q3.3
SS_SD: D8.2 J4.P2 R10.1 U2.4
TX: TP1.TP U2.25
USB_D+ [Power]: D1.1 U2.14
USB_D- [Power]: D1.3 U2.13
VBAT [Power]: C2_BAT.1 MCP73831.3 Q1.1 TP3.TP U4.2 U4.3
VBUS [Power]: C1_BAT.1 C4_USB.1 C5_USB.1 CHG_LED.A D1.5 D2.1 MCP73831.4 PFMF.050.1.2 Q1.2 R1_PWRUSB.2 TP14.TP
VRTC [Power]: C8.1 C10_SUPERCAP.2 R_CAPACITOR.1 U3.14
VUSB [Power]: J2.A4 J2.A9 J2.B4 J2.B9 PFMF.050.1.1

## Tracks (layer width: path | path; a pad name or v marks a point on that pad's centre or on a via)
3V3  (via drill 0.3)
  Top 0.3: J3.2 165.23,18.84 155.19,18.84 132.75,41.27 C1_BAT2.1 132.54,41.27 129.91,41.27 129.64,41 C3.+ 129.5,40.93 129.01,41.41 126.45,41.41 IC4.5 126.31,41.34 125.9,41.34 v125.55,41 | v16.69,43.84 19.32,43.84 R1.1 | v9.97,46.74 9.21,47.51 9.21,47.85 U2.2 | U1.8 38.23,58.52 38.23,57.34 U1.7 38.09,57.2 v36.36,57.2 | R5.2 29.64,50.21 29.64,55.26 30.33,55.95 U1.3 30.54,56.02 v31.72,57.2 | v40.1,36.15 40.86,35.39 R6.2 41.06,35.39 44.39,35.39 R8.2 44.6,35.32 45.7,35.32 R7.2 45.84,35.39 76.73,35.39 77.56,36.22 91.34,36.22 | 80.54,25.62 80.54,26.87 79.84,27.56 Q2.1 | 80.54,25.62 80.54,25.21 80.33,25 77.77,25 76.8,25.97 R_CL1.1 | 80.54,25.62 83.17,25.62 R9.2 83.31,25.69 85.04,27.42 87.32,27.42 91.34,31.44 91.34,36.22 | 90.03,62.88 90.03,62.46 89.33,61.77 89.33,61.35 U3.2 | 90.03,62.88 90.03,63.36 R1-PINH1.2 | 90.03,62.88 91.06,62.88 | 91.06,62.88 92.93,62.88 R2-PINH1.2 93.07,62.74 97.09,58.72 97.09,51.18 | 89.89,65.79 89.12,65.03 88.29,65.03 D7.1 | 89.89,65.79 90.86,65.79 91.06,65.58 91.06,62.88 | 91.34,36.22 91.34,45.43 97.09,51.18 | 68.35,107.55 84.21,107.55 88.85,102.91 TP16.TP 88.99,102.77 89.82,101.94 89.82,65.93 89.89,65.79 | 68.35,107.55 67.52,107.55 R_BOOT.1 | J4.P4 4.92,90.44 5.54,90.44 7.55,92.45 7.55,99.58 C9.1 7.69,99.72 8.86,99.72 R10.2 9,99.79 v10.25,99.79 | v49.1,103.88 47.85,102.63 47.64,102.63 IC1.2 | v52.01,106.78 52.01,107.06 R_RESET.1 | v44.6,107.55 28.32,107.55 | 28.32,107.55 27.56,107.55 R_CHANGE.1 | v28.32,107.48 28.32,107.55 | v68.35,107.68 68.35,107.55 | v107.34,41 97.23,51.11 97.09,51.18
  Bottom 0.3: v9.97,46.74 12.88,43.84 v16.69,43.84 40.1,43.84 | v31.72,57.2 v36.36,57.2 36.42,57.06 40.1,53.39 40.1,43.84 | 40.1,43.84 v40.1,36.15 | v44.6,107.55 45.36,107.55 48.96,103.94 v49.1,103.88 v52.01,106.78 52.15,106.85 53.88,108.58 59.9,108.58 60.8,107.68 v68.35,107.68 | v10.25,99.79 11.01,99.79 18.7,107.48 v28.32,107.48 | v107.34,41 v125.55,41
32KHZ  (via drill 0.3)
  Top 0.15: R2-PINH1.1 92.93,61.56 90.79,61.56 90.58,61.35 U3.1 90.51,61.29 89.89,60.66 v89.89,60.11 | v18.07,54.5 18.07,47.92 U2.9
  Bottom 0.15: v18.07,54.5 23.89,60.32 89.68,60.32 v89.89,60.11
DN
  Top 0.15: J2.A7 164.47,54.5 165.02,54.5 165.23,54.29 165.23,53.81 165.02,53.6 164.47,53.6 J2.B7 164.4,53.53 163.84,53.53 158.93,48.61 154.63,48.61 D1.4
DP
  Top 0.15: 163.64,54.29 163.84,54.08 164.4,54.08 J2.A6 | 163.64,54.29 163.64,54.85 163.78,54.98 164.4,54.98 J2.B6 | D1.6 154.63,50.48 155.74,51.59 160.87,51.59 163.57,54.29 163.64,54.29
EPD_3V3  (via drill 0.3)
  Top 0.3: TP17.TP 78.05,34.83 81.16,34.83 82.06,35.73 86.91,35.73 87.46,35.18 87.46,31.09 84.55,28.18 L1.2 84.35,28.18 83.45,28.18 81.99,26.73 Q2.3 81.85,26.66 81.37,26.18 v81.09,26.18 | J1.16 84.42,15.44 84.83,15.44 J1.15 84.83,15.3 v84.83,14.61 | v78.94,26.04 78.05,26.04 C7.1 | v86.91,21.47 87.6,22.16 EPD_C5.1
  Bottom 0.3: v78.94,26.04 80.95,26.04 v81.09,26.18 81.23,26.18 85.94,21.47 | 85.94,21.47 v86.91,21.47 | v84.83,14.61 84.83,20.29 85.87,21.33 85.94,21.47
EPD_3V3_C  (via drill 0.3)
  Top 0.3: Q2.2 79.78,25.76 79.78,25.97 79.01,26.73 79.01,27.56 78.6,27.98 77.42,27.98 76.8,27.35 R_CL1.2 76.59,27.35 v75.9,27.35 | TP13.TP 24.1,74.93 23.89,74.72 23.89,72.23 20.64,68.97 20.64,65.44 U2.18 20.71,65.3 20.71,64.96 25.41,60.25 38.02,60.25 39.4,58.86 v44.39,58.86
  Bottom 0.3: v44.39,58.86 v75.9,27.35
EPD_BUSY  (via drill 0.3)
  Top 0.15: v87.88,14.61 87.88,15.37 J1.9 | v51.73,58.38 39.33,58.38 38.64,59.07 24.17,59.07 23.48,58.38 17.17,58.38 10.46,65.09 10.46,65.37 U2.26 10.39,65.44 10.39,65.72 8.93,67.17 8.93,74.93 TP9.TP
  Bottom 0.15: v87.88,14.61 87.88,22.23 v51.73,58.38
EPD_CS  (via drill 0.3)
  Top 0.15: v20.57,37.46 20.57,47.85 U2.11 | v20.57,36.49 21.54,35.52 TP10.TP | v86.36,14.61 86.36,15.37 J1.12 | R9.1 84.48,25.62 84.69,25.41 v84.69,24.79 81.44,24.79 80.26,23.61 79.29,23.61 D6.2
  Bottom 0.15: v20.57,37.46 v20.57,36.49 39.13,36.49 39.96,35.66 40.23,35.66 41.34,36.77 41.34,38.5 42.24,39.4 63.23,39.4 75.97,26.66 82.75,26.66 84.62,24.79 v84.69,24.79 87.39,22.09 87.39,21.33 86.36,20.29 v86.36,14.61
EPD_DC
  Top 0.15: J1.11 86.84,15.37 86.84,14.47 86.22,13.85 79.71,13.85 74.72,18.84 72.57,18.84 72.02,19.39 22.51,19.39 6.37,35.52 TP11.TP 6.37,35.59 12.95,42.17 12.95,47.85 U2.5
EPD_RST  (via drill 0.3)
  Top 0.15: v87.39,14.27 87.39,15.37 J1.10 | v38.02,46.81 v63.92,46.81 | v23.06,58.86 16.83,65.09 16.83,65.37 U2.21 16.83,65.44 16.83,65.72 20.29,69.18 20.29,74.93 TP12.TP
  Bottom 0.15: v87.39,14.27 87.6,14.27 87.74,14.13 88.02,14.13 88.36,14.47 88.36,22.37 v63.92,46.81 | v38.02,46.81 25.97,58.86 v23.06,58.86
FLASH_CS
  Top 0.15: D9.2 31.02,50.28 29.64,48.89 R5.1 29.64,48.96 28.95,49.65 | 28.95,49.65 28.95,56.78 30.33,58.17 30.33,58.52 U1.1 | 28.95,49.65 23.34,49.65 21.88,48.2 21.88,47.92 U2.12
GDR
  Top 0.15: J1.2 91.34,15.37 91.34,15.03 88.57,12.26 78.88,12.26 73.41,17.73 R4.1 73.34,17.8 73.2,17.8 72.16,18.84 70.84,18.84 70.08,18.07 69.87,18.07 Q3.1
GND  (via drill 0.3)
  Top 0.3: D8.1 13.5,98.68 13.5,93 15.44,91.06 J4.G2 15.51,90.86 16.41,89.96 16.41,87.19 15.51,86.28 15.51,85.32 J4.G1 | D8.1 13.5,98.89 20.5,105.88 20.5,107.41 C10.2 20.57,107.61 22.16,107.61 22.23,107.68 CHANGE_BUTTON.1 22.37,107.68 25.69,107.68 CHANGE_BUTTON.2 25.9,107.68 26.11,107.68 26.87,106.92 44.74,106.92 45.36,107.55 C5.2 45.57,107.61 47.16,107.61 47.23,107.68 RESET_BUTTON.1 47.37,107.68 49.65,107.68 | TP4.TP 82.55,102.91 76.24,102.91 TP5.TP 76.11,102.97 70.5,102.97 65.86,107.61 BOOT_BUTTON.2 65.72,107.68 62.39,107.68 BOOT_BUTTON.1 62.19,107.68 62.12,107.61 60.52,107.61 C6.2 60.39,107.48 57.69,107.48 52.15,101.94 C_DELAY.2 51.94,101.94 51.66,102.21 49.79,102.21 | 49.79,102.21 49.24,101.66 47.64,101.66 IC1.3 | 49.65,107.68 50.69,107.68 RESET_BUTTON.2 | 49.65,107.68 49.65,103.11 49.72,103.04 49.72,102.35 49.79,102.21 | D11.1 45.7,38.64 44.25,38.64 D12.1 44.04,38.57 43.28,37.81 41.62,37.81 41.06,38.36 41.06,38.57 D10.1 40.93,38.71 36.88,42.76 | 31.79,54.78 32.41,54.78 U1.9 | 31.79,54.78 30.4,54.78 U1.4 | 31.79,54.78 31.79,49.58 31.02,48.82 D9.1 31.09,48.68 31.72,48.06 v31.72,47.92 | v33.38,46.26 36.88,42.76 | U2.29_2 12.4,55.12 12.4,53.95 U2.29_1 12.53,53.95 13.57,53.95 U2.29_4 13.71,53.95 14.82,53.95 U2.29_7 | U2.29_3 12.4,56.37 12.4,55.26 U2.29_2 | U2.29_5 13.57,55.19 12.53,55.19 U2.29_2 | U2.29_8 14.89,55.12 14.89,54.08 U2.29_7 | U2.29_3 12.53,56.44 13.57,56.44 U2.29_6 13.71,56.44 14.82,56.44 U2.29_9 | 7.89,64.26 7.89,60.87 12.26,56.51 U2.29_3 | 7.89,64.26 7.89,65.37 U2.28 | 6.79,66 6.79,76.73 1.25,82.27 J4.G3 1.32,82.41 1.32,89.33 4.5,92.52 J4.P6 4.85,92.66 4.57,92.66 2.35,94.87 2.35,95.36 J4.G4 2.29,95.5 2.29,95.63 7.62,100.97 C9.2 7.69,101.11 8.24,101.66 9.63,101.66 v11.63,99.65
  Top 0.3: 6.79,66 6.79,55.68 7.83,54.64 7.83,47.92 U2.1 | v7.76,64.26 7.89,64.26 | v6.72,66 6.79,66 | v17.59,50.97 17.59,51.18 14.96,53.81 U2.29_7 | v13.09,99.65 13.57,99.17 D8.1 | J1.17 83.86,15.44 83.86,15.93 84.07,16.14 88.09,16.14 88.29,15.93 88.29,15.44 J1.8 88.36,15.3 88.36,14.89 88.43,14.82 88.43,14.4 87.19,13.16 | R4.2 74.65,17.73 79.29,13.09 79.29,12.95 J1.MP2 79.43,13.16 87.19,13.16 | C8.2 94.25,53.46 95.22,54.43 C10_SUPERCAP.1 95.15,54.15 96.26,53.05 96.26,51.45 93.83,49.03 93.14,49.03 | 86.77,49.93 86.77,51.94 U3.13 | 86.77,49.93 87.67,49.03 93.14,49.03 | EPD_C11.2 73.68,20.98 74.93,20.98 EPD_C9.2 75.07,21.05 77.56,23.55 D6.1 | C7.2 77.97,27.29 77.35,26.66 76.17,26.66 75.97,26.45 75.97,25.35 77.7,23.61 D6.1 | SJ1.1 67.86,12.67 67.86,12.4 68.7,11.56 70.01,11.56 71.12,12.67 71.12,12.81 R2.1 71.26,12.6 76.04,12.6 77.08,11.56 87.19,11.56 | EPD_C1.2 90.23,23.48 92.8,20.91 92.8,12.95 J1.MP1 92.66,12.88 91.34,11.56 87.19,11.56 | EPD_C1.2 90.03,23.55 88.92,23.55 EPD_C2.2 88.78,23.55 87.74,23.55 EPD_C5.2 87.6,23.55 86.49,23.55 EPD_C6.2 86.36,23.48 85.25,23.48 EPD_C7.2 85.04,23.55 83.93,23.55 EPD_C8.2 83.79,23.55 82.68,23.55 EPD_C10.2 82.55,23.55 81.3,23.55 EPD_C12.2 81.16,23.41 80.61,22.85 78.6,22.85 77.97,23.48 77.84,23.48 D6.1 | EPD_C1.2 90.3,23.61 92.17,25.48 92.17,27.91 D3.1 92.31,28.05 93.14,28.88 v93.14,46.33 | v93.14,48.41 93.14,49.03 | v87.19,12.74 87.19,13.16 | v87.19,11.49 87.19,11.56 | 124.61,47.96 125.55,47.02 125.69,47.02 R2_BAT.1 125.83,47.09 126.87,47.09 129.22,49.44 129.22,50.21 128.74,50.69 128.39,50.69 MCP73831.2 128.25,50.83 127.91,50.83 127.42,51.31 127.42,52.15 129.22,53.95 130.74,53.95 C2_BAT.2
  Top 0.3: 124.61,47.96 122.57,50 R1_PWRUSB.1 | C1_BAT2.2 132.54,39.96 131.64,39.96 129.57,37.88 C3.- 129.43,37.95 125.07,37.95 124.51,38.5 124.37,38.57 | 124.06,40.27 124.37,39.96 124.37,38.57 | 124.06,40.27 123.89,40.44 123.61,40.44 IC4.2 | 124.37,38.57 122.85,37.05 121.88,37.05 121.19,37.74 C1_BAT1.2 121.05,38.3 119.39,39.96 C5_USB.2 119.32,40.1 118.62,40.79 118.62,41.97 | 118.62,41.97 124.61,47.96 | C1.2 156.16,4.43 154.98,4.43 C2.2 154.84,4.5 154.15,5.19 154.15,6.44 155.6,7.89 156.64,7.89 156.99,8.24 156.99,8.59 SENSOR2.7 157.13,8.73 157.13,9.07 157.54,9.49 | 157.54,9.49 158.24,9.49 158.65,9.07 158.65,8.73 SENSOR2.5 | 157.54,9.49 157.47,9.63 156.3,10.8 156.3,11.56 SENSOR2.1 156.3,11.77 156.3,11.98 162.11,17.8 J3.1 165.37,17.87 165.72,17.87 166.2,18.35 166.2,49.24 | J2.B12 164.4,51.24 164.4,50.97 J2.A1 164.47,50.83 164.47,49.72 164.95,49.24 J2.MP3 165.09,49.24 166.2,49.24 | 166.2,49.24 167.03,49.24 | 167.03,49.24 168.9,49.24 J2.MP1 | 167.03,59.42 165.09,59.42 J2.MP4 164.95,59.35 164.54,58.93 164.54,57.76 J2.A12 164.4,57.62 164.4,57.41 J2.B1 164.26,57.34 161.42,57.34 156.3,52.22 C1_BAT.2 156.16,52.15 154.91,52.15 153.04,50.28 153.04,50.07 152.63,49.65 152.21,49.65 D1.2 | 167.03,59.42 168.9,59.42 J2.MP2 | 167.03,59.42 167.03,49.24 | U4.4 136.22,52.56 136.49,52.56 137.12,53.18 137.12,53.32 U4.9 | U4.6 138.08,53.12 137.25,53.12 U4.9 | U4.1 136.22,54.08 136.56,54.08 137.18,53.46 U4.9 | R2-USB1.1 153.39,45.77 153.39,46.95 R2-USB.2 153.25,47.09 153.25,47.99 | D1.2 152.07,49.58 151.66,49.58 151.1,50.14 148.61,50.14 C4_USB.2 148.47,50.07 147.36,50.07 146.46,49.17 140.72,49.17 137.53,52.35 137.53,52.98 U4.9
  Top 0.3: 153.25,47.99 153.25,48.96 152.7,49.51 D1.2 | 124.06,40.27 130.26,46.47 148.4,46.47 149.93,47.99 153.25,47.99 | v114.19,46.33 118.49,42.03 118.62,41.97 | 36.88,42.76 39.33,45.22 81.99,45.22 86.63,49.86 86.77,49.93
  Bottom 0.3: v33.38,46.26 v31.72,47.92 31.58,47.99 20.57,47.99 v17.59,50.97 | v7.76,64.26 7.76,64.96 v6.72,66 | v11.63,99.65 v13.09,99.65 | v93.14,48.41 v93.14,46.33 v114.19,46.33 | v87.19,11.49 v87.19,12.74
  pour Top: 76.92,10.1 76.95,10.11 95.27,10.11 95.29,10.1 95.31,10.08 95.33,10.05 95.33,0.08 170.1,0.08 170.1,67.11 92.19,67.11 92.16,67.12 92.14,67.14 92.13,67.17 92.13,111.18 68.28,111.18 68.28,109.97 68.26,109.94 68.24,109.92 68.21,109.91 19.92,109.91 19.9,109.92 19.87,109.94 19.86,109.97 19.86,111.18 0.08,111.18 0.08,65.74 6.37,65.74 6.39,65.72 6.41,65.7 6.43,65.67 6.43,47.61 6.41,47.58 6.39,47.56 6.37,47.55 0.08,47.55 0.08,0.08 76.89,0.08 76.89,10.05 76.9,10.08
  pour Bottom: 76.92,10.1 76.95,10.11 95.27,10.11 95.29,10.1 95.31,10.08 95.33,10.05 95.33,0.08 170.1,0.08 170.1,67.11 92.19,67.11 92.16,67.12 92.14,67.14 92.13,67.17 92.13,111.18 68.28,111.18 68.28,109.97 68.26,109.94 68.24,109.92 68.21,109.91 19.92,109.91 19.9,109.92 19.87,109.94 19.86,109.97 19.86,111.18 0.08,111.18 0.08,65.74 6.37,65.74 6.39,65.72 6.41,65.7 6.43,65.67 6.43,47.61 6.41,47.58 6.39,47.56 6.37,47.55 0.08,47.55 0.08,0.08 76.89,0.08 76.89,10.05 76.9,10.08
GPIO8
  Top 0.15: R1.2 19.32,45.15 19.32,47.85 U2.10
I2C_PW  (via drill 0.3)
  Top 0.3: R1-PINH.2 157.47,5.75 156.37,5.75 C1.1 156.16,5.75 154.98,5.75 C2.1 154.91,5.89 v154.91,6.44 | R2-PINH.2 158.72,5.75 157.61,5.75 R1-PINH.2 | SENSOR2.6 157.89,8.66 157.89,5.89 R1-PINH.2 | 153.67,6.58 154.22,7.13 | 154.22,7.13 155.74,8.66 156.23,8.66 SENSOR2.8 | 153.67,6.58 153.67,4.5 154.43,3.74 159.28,3.74 160.11,4.57 160.11,11.36 159,12.46 157.61,12.46 157.13,11.98 157.13,11.63 SENSOR2.2 | v26.11,60.8 21.88,65.03 21.88,65.37 U2.17 | v96.81,60.8 150.97,6.65 153.53,6.65 153.67,6.58 | v154.15,7.2 154.22,7.13
  Bottom 0.3: v96.81,60.8 v26.11,60.8 | v154.15,7.2 v154.91,6.44
INT_RTC
  Top 0.15: R1-PINH1.1 88.71,63.36 88.71,62.05 88.02,61.35 U3.3 88.02,61.29 88.02,60.94 93.56,55.4 95.98,55.4 96.67,54.71 96.67,51.31 82.61,37.26 20.98,37.26 20.71,36.98 19.18,36.98 17.8,35.59 TP15.TP 17.73,35.59 16.2,37.12 16.2,43.97 16.76,44.53 16.76,47.85 U2.8
IO/BOOT  (via drill 0.3)
  Top 0.15: R_BOOT.2 67.45,108.86 66.06,108.86 65.79,109.14 BOOT_BUTTON.3 65.72,109.21 62.33,109.21 BOOT_BUTTON.4 62.19,109.14 61.91,108.86 60.52,108.86 C6.1 60.45,108.79 v59.69,108.03 | v24.45,72.78 24.45,65.44 U2.15
  Bottom 0.15: v59.69,108.03 v24.45,72.78
IO/CHANGE
  Top 0.15: R_CHANGE.2 27.49,108.86 26.04,108.86 25.76,109.14 CHANGE_BUTTON.3 25.69,109.21 22.3,109.21 CHANGE_BUTTON.4 22.23,109.14 21.95,108.86 20.57,108.86 C10.1 20.5,108.79 12.6,100.9 12.6,99.51 12.67,99.44 12.67,86.28 17.73,81.23 17.73,74.44 14.27,70.98 14.27,65.44 U2.23
MISO  (via drill 0.3)
  Top 0.15: v6.03,92.93 5.26,93.69 5.12,93.69 J4.P7 | v5.75,76.17 5.75,75.62 5.12,75 TP6.TP | v43.63,36.7 44.39,36.7 R8.1 | v43.28,38.92 43.28,39.33 44.04,40.1 D12.2 44.04,40.16 v39.54,44.67 | v30.4,56.65 U1.2 | v29.22,57.76 16.55,57.76 9.21,65.09 9.21,65.37 U2.27 9.14,65.44 9.14,65.65 v8.24,66.55
  Bottom 0.15: 6.03,89.4 6.03,89.33 5.75,89.06 v5.75,76.17 | 6.03,89.4 v6.03,92.93 | v43.63,36.7 43.63,38.57 v43.28,38.92 | v39.54,44.67 39.54,45.91 30.4,55.05 v30.4,56.65 30.33,56.65 v29.22,57.76 | 6.03,89.4 6.37,89.4 8.24,87.53 v8.24,66.55
MOSI  (via drill 0.3)
  Top 0.15: TP7.TP 13.99,35.59 15.51,37.12 15.51,47.85 U2.7 15.44,47.92 15.44,48.2 v10.32,53.32 | v6.23,88.92 5.89,89.26 5.12,89.26 J4.P3 | v44.94,47.99 38.23,54.71 U1.5 38.16,54.71 34.9,51.45 v32.76,51.45 | v44.94,40.93 45.7,40.16 D11.2 45.77,40.1 45.77,39.82 46.4,39.2 v46.4,37.74 | v81.02,14.61 81.51,14.13 84.97,14.13 85.32,14.47 85.32,15.37 J1.14 | v46.4,36.01 45.77,36.63 R7.1
  Bottom 0.15: v6.23,88.92 6.23,67.52 10.32,63.43 v10.32,53.32 10.32,53.12 9.97,52.77 9.97,51.8 10.32,51.45 v32.76,51.45 | v44.94,40.93 v44.94,47.99 | v81.02,14.61 67.8,14.61 v46.4,36.01 v46.4,37.74
N$1
  Top 0.15: R1_BAT.1 119.32,51.45 119.53,51.45 120.29,50.69 127.21,50.69 128.04,49.86 128.25,49.86 MCP73831.1
N$2
  Top 0.15: R2-USB1.2 154.7,45.77 156.57,45.77 163.84,53.05 164.4,53.05 J2.A5
N$3  (via drill 0.3)
  Top 0.15: v155.81,48.13 154.7,47.02 R2-USB.1 | v163.43,55.75 163.57,55.75 163.84,56.02 164.4,56.02 J2.B5
  Bottom 0.15: v163.43,55.75 v155.81,48.13
N$4
  Top 0.15: C1_BAT1.1 122.36,37.81 122.36,38.36 123.54,39.54 IC4.3 123.47,39.54 122.92,40.1 122.92,41.69 | 122.92,41.69 123.33,41.69 123.54,41.48 IC4.1 123.61,41.48 131.44,49.31 133.31,49.31 Q1.3 | 122.92,41.69 121.12,41.69 D2.2
N$5
  Top 0.15: J1.5 89.82,15.44 89.82,21.26 88.92,22.16 EPD_C2.1
N$6
  Top 0.15: J1.4 90.3,15.44 90.3,22.09 90.23,22.16 EPD_C1.1
N$7
  Top 0.15: J1.18 83.38,15.44 83.38,19.18 86.36,22.16 EPD_C6.1
N$8
  Top 0.15: J1.19 82.89,15.44 82.89,20.01 85.04,22.16 EPD_C7.1
N$9
  Top 0.15: J1.20 82.41,15.44 82.41,20.77 83.79,22.16 EPD_C8.1
N$11
  Top 0.15: J1.22 81.37,15.44 81.37,20.98 82.55,22.16 EPD_C10.1
N$13
  Top 0.15: J1.24 80.4,15.44 80.4,21.33 81.23,22.16 EPD_C12.1
N$31
  Top 0.15: CHG_LED.C 122.5,51.52 120.63,51.52 R1_BAT.2
N$32
  Top 0.15: R_CAPACITOR.2 88.09,49.86 88.09,50.34 87.46,50.97 87.46,63.23 88.57,64.33 89.68,64.33 90.3,64.96 D7.2
N$35
  Top 0.15: R2_BAT.2 125.76,48.34 125.76,49.79 MCP73831.5
N$36
  Top 0.15: C4.1 97.3,31.79 95.77,31.79 D4.1 95.77,31.72 95.77,27.98 D3.2
N$37
  Top 0.15: C_DELAY.1 51.94,103.25 50.69,103.25 50.41,103.53 IC1.5
PREVGH  (via drill 0.3)
  Top 0.15: v81.85,16.2 81.85,15.44 J1.21 | v78.6,16.2 75.14,19.67 75,19.67 EPD_C9.1 74.86,19.67 74.24,20.29 73.2,20.29 72.99,20.5 72.99,25.07 81.44,33.52 83.03,33.52 84.48,34.97 86.22,34.97 D5.1
  Bottom 0.15: v78.6,16.2 v81.85,16.2
PREVGL  (via drill 0.3)
  Top 0.15: 76.07,17.9 74.86,19.11 74.24,19.11 73.68,19.67 EPD_C11.1 | 76.07,17.9 79.22,14.75 80.54,14.75 80.81,15.03 80.81,15.37 J1.23 | v82.41,24.24 84.76,24.24 85.18,24.65 85.18,24.72 92.17,31.72 D4.2 | 76.07,17.9 v76.17,18
  Bottom 0.15: v76.17,18 v82.41,24.24
RESE
  Top 0.15: 71.53,17.66 71.19,18 Q3.2 | 71.53,17.66 77.21,11.98 89.26,11.98 92.24,14.96 92.24,15.93 92.1,16.07 91.13,16.07 90.86,15.79 90.86,15.44 J1.3 | 71.53,17.66 68.42,14.54 R3.1
RESE'
  Top 0.15: R2.2 71.12,14.2 69.94,14.2 69.67,14.47 R3.2 69.94,14.13 69.94,13.3 69.39,12.74 SJ1.2
RESET  (via drill 0.3)
  Top 0.15: R_RESET.2 52.49,108.86 51.04,108.86 50.76,109.14 RESET_BUTTON.3 50.69,109.21 47.3,109.21 RESET_BUTTON.4 47.23,109.14 47.09,109.14 46.19,108.24 v46.19,108.17 45.57,108.79 C5.1 | v47.58,106.78 47.58,103.6 IC1.1 | v10.46,51.94 10.46,47.92 U2.3
  Bottom 0.15: v47.58,106.78 v46.19,108.17 44.6,108.17 23.96,87.53 23.96,66.34 10.46,52.84 v10.46,51.94
RTC_RST
  Top 0.15: U2.16 23.2,65.37 23.2,65.09 25.76,62.53 85.8,62.53 86.7,61.63 86.7,61.35 U3.4
RX
  Top 0.15: U2.24 13.02,65.44 13.02,71.47 16.48,74.93 TP2.TP
SCK  (via drill 0.3)
  Top 0.15: 11.18,36.6 10.18,35.59 TP8.TP | 11.18,36.6 14.2,39.61 14.2,47.85 U2.6 14.2,47.92 14.2,48.2 13.37,49.03 v12.33,49.03 | v3.95,91.13 4.29,91.48 5.05,91.48 J4.P5 | v40.65,53.53 38.23,55.95 U1.6 | v40.65,41 40.65,40.51 41,40.16 D10.2 41.06,40.1 41.06,39.82 41.83,39.06 v41.83,38.36 | v85.8,14.34 85.8,15.37 J1.13 | v41.69,36.01 41.06,36.63 R6.1 40.93,36.63 39.96,36.63 37.67,34.35 13.43,34.35 11.18,36.6
  Bottom 0.15: v3.95,91.13 3.95,69.39 9.7,63.64 9.7,51.66 v12.33,49.03 | v40.65,41 v40.65,53.53 | v85.8,14.34 85.18,14.34 84.97,14.13 63.57,14.13 v41.69,36.01 41.69,36.08 41.83,36.22 v41.83,38.36
SCL  (via drill 0.3)
  Top 0.15: 159.17,11.12 158.72,11.56 SENSOR2.4 | 159.17,11.12 159.69,10.6 159.69,5.12 159,4.43 158.79,4.43 R2-PINH.1 | v142.31,49.72 138.5,53.53 138.15,53.53 U4.7 | 164.57,21.5 165.23,20.84 J3.4 | 164.57,21.5 v142.31,43.77 | v159.34,11.29 159.17,11.12 | v164.54,21.47 164.57,21.5 | v23.82,59.35 18.07,65.09 18.07,65.37 U2.20 | v89.47,53.39 90.51,52.35 90.51,52.01 U3.16
  Bottom 0.15: v142.31,43.77 v142.31,49.72 142.31,51.59 140.51,53.39 v89.47,53.39 83.52,59.35 v23.82,59.35 | v159.34,11.29 159.34,16.27 v164.54,21.47
SDA  (via drill 0.3)
  Top 0.15: 158.96,10.28 157.89,11.36 157.89,11.56 SENSOR2.3 | 158.96,10.28 159.41,9.83 159.41,5.26 159.28,5.12 158.24,5.12 157.54,4.43 R1-PINH.1 | v142.93,49.72 138.57,54.08 U4.8 | v142.93,41.83 164.95,19.8 J3.3 164.75,19.94 v164.19,19.39 | v159.14,10.46 158.96,10.28 | v24.65,59.83 19.39,65.09 19.39,65.37 U2.19 | v88.99,54.5 88.99,52.28 U3.15
  Bottom 0.15: v142.93,41.83 v142.93,49.72 142.93,51.38 139.82,54.5 v88.99,54.5 83.65,59.83 v24.65,59.83 | v159.14,10.46 164.19,15.51 v164.19,19.39
SRC  (via drill 0.3)
  Top 0.15: v93.69,33.17 97.3,33.17 C4.2 | v85.32,33.71 84.52,32.79 L1.1 | Q3.3 70.57,20.15 70.57,23.06 82.48,34.97 82.68,34.97 D5.2 82.75,34.97 v83.86,34.97
  Bottom 0.15: v93.69,33.17 85.86,33.17 v85.32,33.71 85.12,33.71 v83.86,34.97
SS_SD
  Top 0.15: R10.1 8.93,100.97 9.7,100.97 11.91,98.75 D8.2 11.91,98.68 11.91,93.97 6.16,88.22 5.54,88.22 J4.P2 6.16,88.16 7.2,87.12 7.2,55.82 11.63,51.38 11.63,47.92 U2.4
TX
  Top 0.15: U2.25 11.7,65.44 11.7,73.96 12.67,74.93 TP1.TP
USB_D+  (via drill 0.3)
  Top 0.3: v141.55,51.73 150.13,51.73 151.38,50.48 152.07,50.48 D1.1 | v59,51.73 49.44,51.73 45.08,47.37 24.93,47.37 24.45,47.85 U2.14
  Bottom 0.3: v59,51.73 v141.55,51.73
USB_D-  (via drill 0.3)
  Top 0.3: v134.62,48.68 146.6,48.68 147.43,49.51 149.65,49.51 150.55,48.61 152.07,48.61 D1.3 | v65.58,45.77 34.62,45.77 33.59,46.81 23.89,46.81 23.2,47.51 23.2,47.85 U2.13
  Bottom 0.3: v134.62,48.68 126.87,48.68 123.96,45.77 v65.58,45.77
VBAT
  Top 0.3: U4.2 136.22,53.53 136.22,53.12 U4.3 136.08,53.05 135.52,53.05 | 134.07,53.05 131.16,53.05 C2_BAT.1 130.68,52.63 129.84,51.8 128.32,51.8 MCP73831.3 | 134.07,53.05 135.52,53.05 | 134.07,53.05 134.07,48.82 132.54,47.3 132.41,47.3 Q1.1 | 135.52,53.05 135.52,54.29 145.98,64.75 148.54,64.75 TP3.TP
VBUS  (via drill 0.3)
  Top 0.3: C1_BAT.1 156.16,50.83 156.16,50.69 155.05,49.58 154.63,49.58 D1.5 154.5,49.44 v153.53,49.44 | Q1.2 134.34,47.3 147.02,47.3 148.54,48.82 C4_USB.1 148.68,48.96 v149.44,48.96 | v150.13,47.44 150.13,43.21 PFMF.050.1.2 | D2.1 121.05,39.61 119.39,41.27 C5_USB.1 119.46,41.41 119.46,42.03 v124.51,47.09 | 124.86,51.52 125.48,51.52 125.69,51.73 MCP73831.4 125.83,51.8 140.09,66.06 149.16,66.06 149.93,65.3 149.93,64.26 148.61,62.95 148.61,61.01 TP14.TP 148.68,60.87 v149.86,59.69 | 124.86,51.52 124.1,51.52 CHG_LED.A | v124.58,50.21 124.44,50.07 123.89,50.07 R1_PWRUSB.2 | 124.86,51.52 v124.86,51.18
  Bottom 0.3: 149.93,49.44 v153.53,49.44 | 149.93,49.44 v149.44,48.96 149.51,48.82 150.13,48.2 v150.13,47.44 | v124.86,51.18 124.58,50.9 v124.58,50.21 124.51,50.07 v124.51,47.09 | v149.86,59.69 149.86,49.58 149.93,49.44
VRTC
  Top 0.3: C10_SUPERCAP.2 95.22,52.22 93,52.22 C8.1 92.86,52.15 92.38,52.15 90.44,50.21 89.54,50.21 R_CAPACITOR.1 89.4,49.86 89.4,50.14 88.02,51.52 88.02,51.94 U3.14
VUSB
  Top 0.3: J2.A9 164.4,56.78 164.4,56.58 J2.B4 164.54,56.51 165.09,56.51 165.65,55.95 165.65,52.63 165.09,52.08 164.54,52.08 J2.B9 164.4,52.01 164.4,51.8 J2.A4 164.26,51.73 163.22,51.73 154.7,43.21 PFMF.050.1.1

## Text on the board
tPlace: GND | GND | 3v3 | MISO | EPD_BUSY | TX | RX | EPD_RS | EPD_3V3_C | VBAT | VBUS | EPD_3V3 | EPD_DC | SCK | MOSI | INT_RTC | EPD_CS